# Altium PCB p253616.PcbDoc
Units mil, origin at the board's own origin, x right, y up, seen from the top; angles counter-clockwise.
Board outline 4800 x 4000 mil, 2 copper layers (Top Layer, Bottom Layer); 134 components, 116 nets, 391 pads, 60 vias.
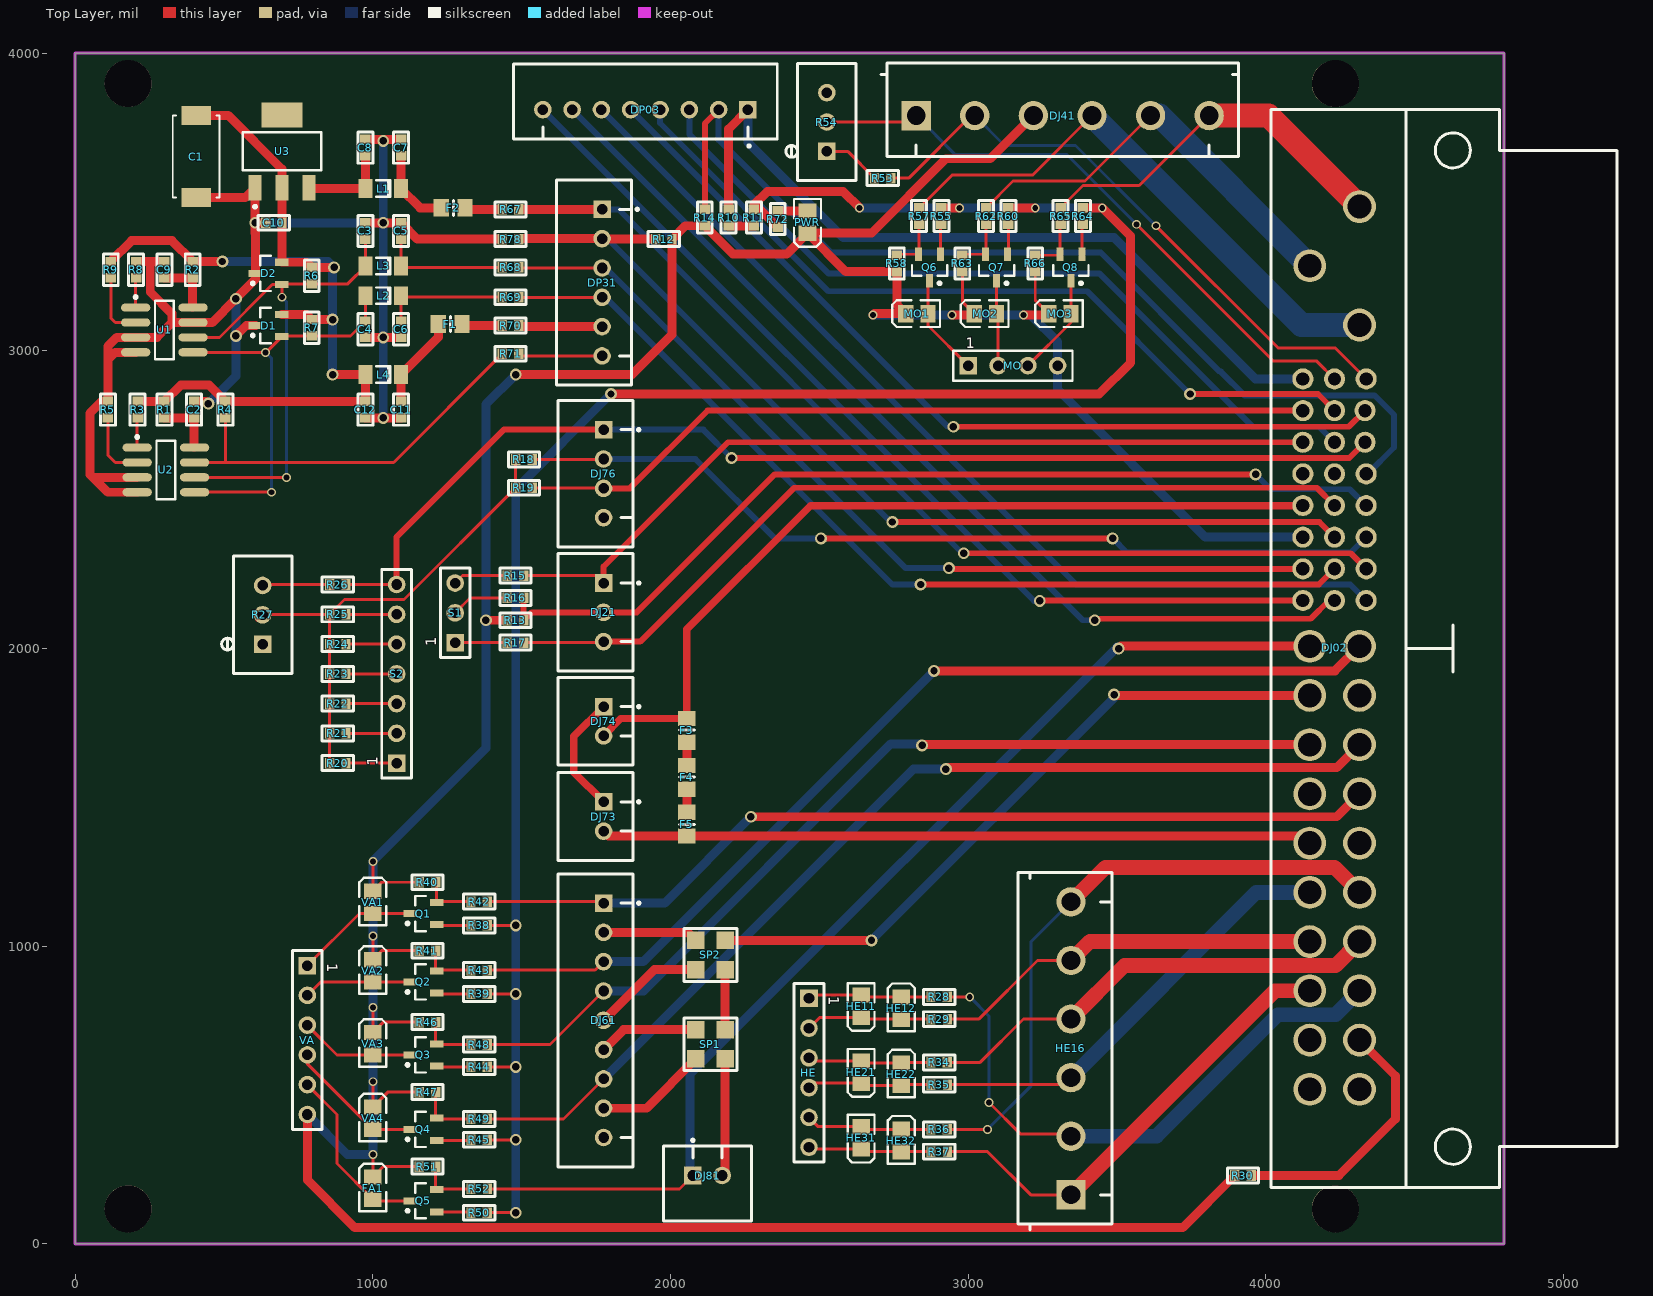
[diagram p0: Top Layer view]
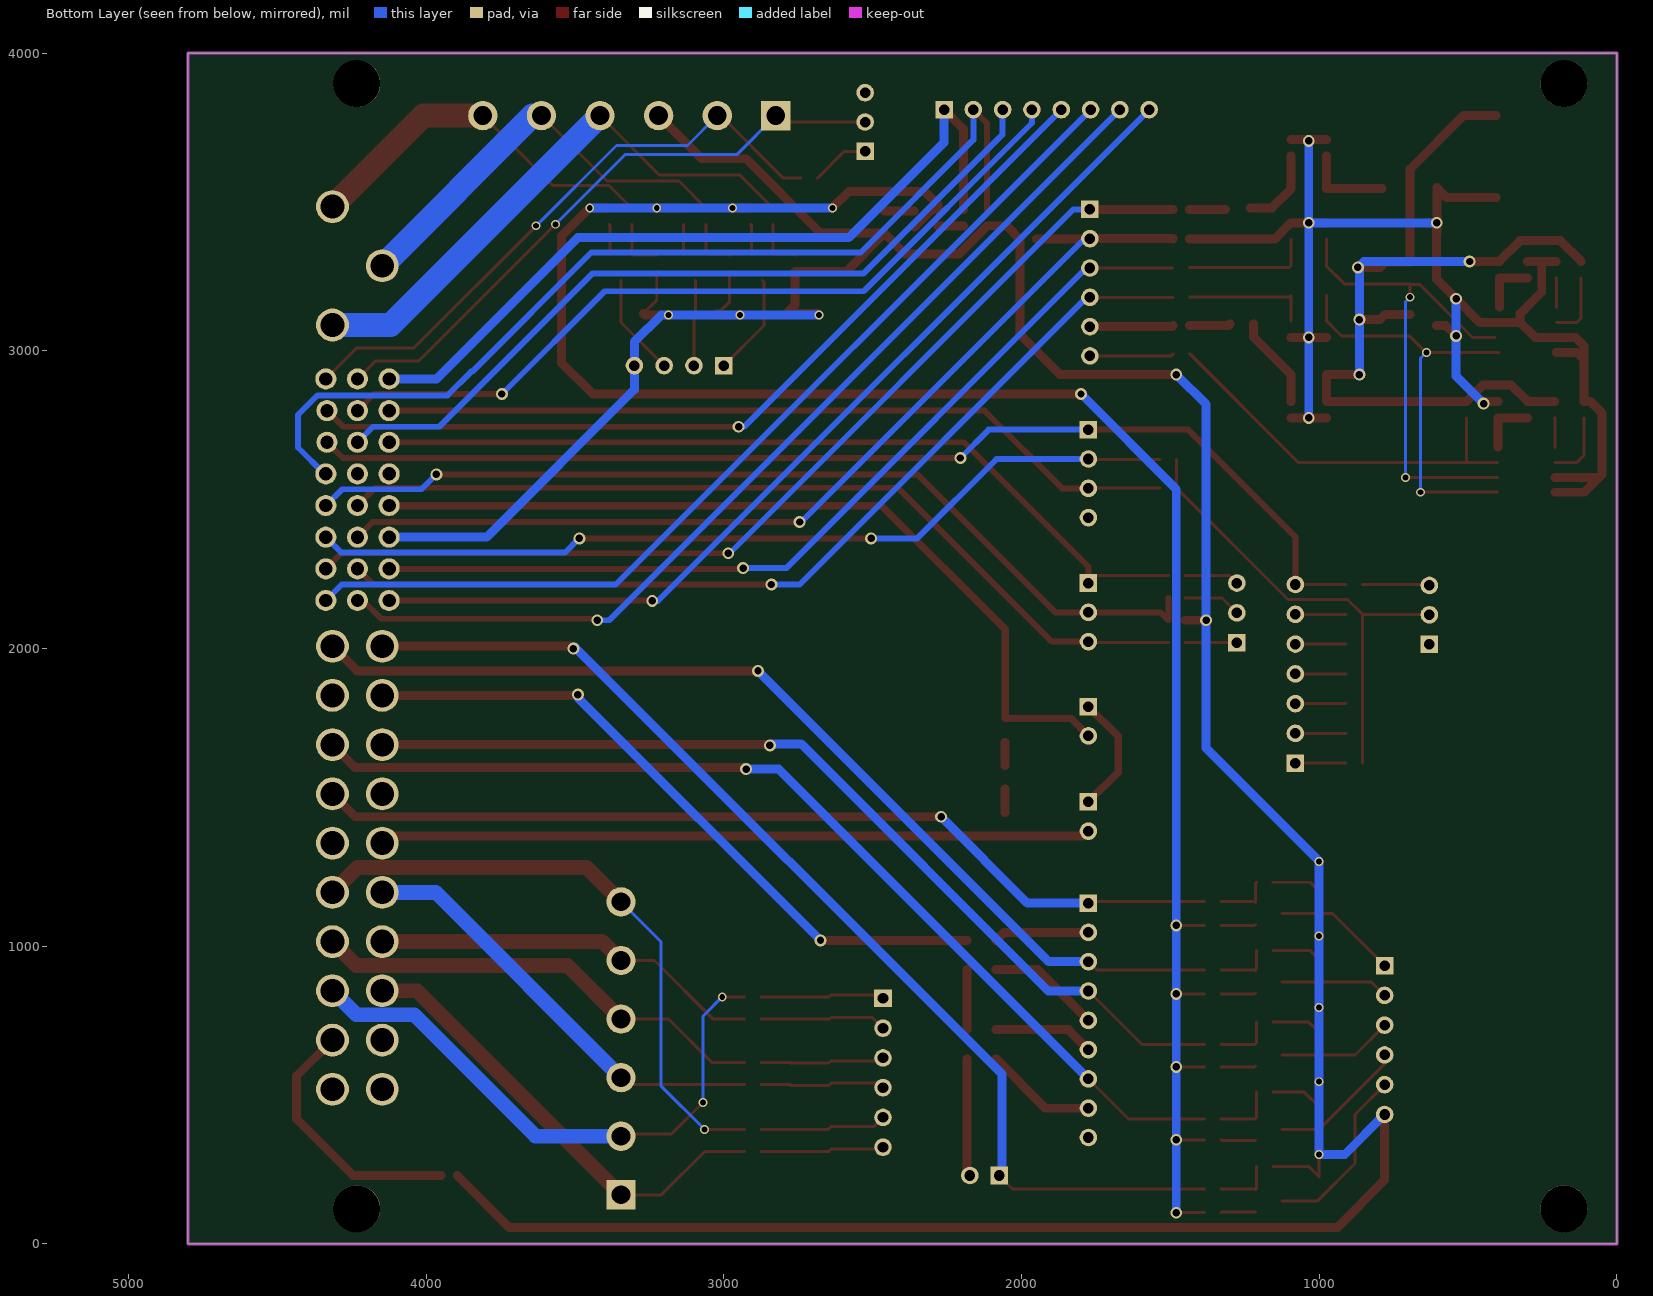
[diagram p1: Bottom Layer view, seen from below]

## Layer stack, top to bottom
Top Layer: signal copper 1.4
Dielectric: dielectric 12.6, FR-4, Dk 4.8
Bottom Layer: signal copper 1.4

## Board outline
0,0 0,4000 4800,4000 4800,0

## Design rules (kind name [scope] priority, off if disabled: settings)
Clearance [All] p1: gap=0
HoleSize [All] p1: absolutevalues=TRUE maxlimit=100 minlimit=10 maxpercent=80.000 minpercent=20.000
PolygonConnect [All] p1: connectstyle=Relief reliefconductorwidth=10 reliefentries=4 polygonreliefangle="90 Angle"
RoutingVias [All] p1: holewidth=28 width=50 viastyle="Through Hole" minholewidth=10 minwidth=30 maxholewidth=28 maxwidth=50
SilkscreenOverComponentPads [All] p1: minsilkscreentomaskgap=10
SolderMaskExpansion [All] p1: expansion=4
Width [All] p1: maxlimit=200 minlimit=10 preferedwidth=10
26 further rules are at their usual default settings.

## Classes and differential pairs
component class p253616: DJ02 DJ21 DJ41 DJ61 DJ73 DJ74 DJ76 DJ81 DP03 DP31 F3 F4 F5 FA1 HE HE11 HE12 HE16 HE21 HE22 HE31 HE32 MO MO1 MO2 MO3 PWR Q1 Q2 Q3 Q4 Q5 Q6 Q7 Q8 R10 R11 R12 R13 R14 R15 R16 R17 R18 R19 R20 R21 R22 R23 R24 R25 R26 R27 R28 R29 R30 R34 R35 R36 R37 R38 R39 R40 R41 R42 R43 R44 R45 R46 R47 R48 R49 R50 R51 R52 R53 R54 R55 R57 R58 R60 R62 R63 R64 R65 R66 R72 S1 S2 SP1 SP2 VA VA1 VA2 VA3 VA4
component class ID: C1 C2 C3 C4 C5 C6 C7 C8 C9 C10 C11 C12 D1 D2 F1 F2 L1 L2 L3 L4 R1 R2 R3 R4 R5 R6 R7 R8 R9 R67 R68 R69 R70 R71 R78 U1 U2 U3

## Components (designator, comment, footprint, x,y, rotation, side; value= is the part's Value field where it differs from the comment)
C1 "10uF/16V" 7343-CAP 410,3665 r270 top
C2 "100nF" 0603INCH_1608mm 400,2830 r270 top
C3 "33pF" 0603INCH_1608mm 975,3430 r270 top
C4 "33pF" 0603INCH_1608mm 975,3045.12 r90 top
C5 "33pF" 0603INCH_1608mm 1095,3430 r270 top
C6 "33pF" 0603INCH_1608mm 1095,3045.12 r90 top
C7 "100nF" 0603INCH_1608mm 1095,3710 r270 top
C8 "100nF" 0603INCH_1608mm 975,3710 r270 top
C9 "100nF" 0603INCH_1608mm 300,3300 r270 top
C10 "100nF" 0603INCH_1608mm 640,3430 r0 top
C11 "100nF" 0603INCH_1608mm 1095,2775 r90 top
C12 "100nF" 0603INCH_1608mm 975,2775 r90 top
D1 "BAT64-04" SOT23_N 650,3085 r180 top
D2 "BAT64-04" SOT23_N 650,3260 r180 top
DJ02 "CS-223-48" PCIH47M 4627.52,2000 r90 top locked
DJ21 "CS-223-47" XH3_2.5mm 1775,2220 r270 top
DJ41 "DP6" KF301-6P_5mm 2825,3790 r0 top locked
DJ61 "CS-223-45" XH9_2.5mm 1775,1145 r270 top
DJ73 "CS-223-11" XH2_2.5mm 1775,1485 r270 top
DJ74 "CS-223-69" XH2_2.5mm 1775,1805 r270 top
DJ76 "CS-223-87" XH4_2.5mm 1775,2735 r270 top
DJ81 "CS-223-11" XH2_2.5mm 2075,230 r0 top
DP03 "CS-223-77" XH8_2.5mm 2260,3810 r180 top
DP31 "DP6" XH6_2.5mm 1770,3475 r270 top
F1 "200mA" Fuse 1299.8,3090 r270 top
F2 "200mA" Fuse 1310,3480 r270 top
F3 "Fuse" Fuse 2055,1765 r0 top
F4 "Fuse" Fuse 2055,1607.4 r0 top
F5 "Fuse" Fuse 2055,1370 r180 top
FA1 "LED" "LED 0805" 1000,150 r90 top
HE "DP6" Pin6_2.54mm 2465,825 r270 top
HE11 "LED" "LED 0805" 2640,836.06 r270 top
HE12 "LED" "LED 0805" 2775,755 r90 top
HE16 "DP6" KF301-6P_5mm 3345,165 r90 top
HE21 "LED" "LED 0805" 2640,615 r270 top
HE22 "LED" "LED 0805" 2775,532.5 r90 top
HE31 "LED" "LED 0805" 2640,393.94 r270 top
HE32 "LED" "LED 0805" 2775,310 r90 top
L1 "33uH" "3216 Chip" 1035,3545 r180 top
L2 "33uH" "3216 Chip" 1035,3185.12 r180 top
L3 "33uH" "3216 Chip" 1035,3285 r180 top
L4 "33uH" "3216 Chip" 1035,2920 r180 top
MO "DP4" Pin4_2.54mm 3000,2950 r0 top
MO1 "LED" "LED 0805" 2865,3125 r180 top
MO2 "LED" "LED 0805" 3095,3125 r180 top
MO3 "LED" "LED 0805" 3345,3125 r180 top
PWR "LED" "LED 0805" 2460,3470 r270 top
Q1 "2N7002" SOT23_N 1170,1110 r180 top
Q2 "2N7002" SOT23_N 1170,880 r180 top
Q3 "2N7002" SOT23_N 1170,635 r180 top
Q4 "2N7002" SOT23_N 1170,385 r180 top
Q5 "2N7002" SOT23_N 1170,145 r180 top
Q6 "2N7002" SOT23_N 2870,3280 r270 top
Q7 "2N7002" SOT23_N 3095,3280 r270 top
Q8 "2N7002" SOT23_N 3345,3280 r270 top
R1 "2E21" 0603INCH_1608mm 300,2775 r90 top
R2 "2E21" 0603INCH_1608mm 395,3245 r90 top
R3 "0E" 0603INCH_1608mm 210,2775 r90 top
R4 "1K0" 0603INCH_1608mm 505,2775 r90 top
R5 "0E" 0603INCH_1608mm 110,2775 r90 top
R6 "10K" 0603INCH_1608mm 795,3225 r90 top
R7 "10K" 0603INCH_1608mm 795,3050 r90 top
R8 "0E" 0603INCH_1608mm 205,3245 r90 top
R9 "0E" 0603INCH_1608mm 120,3245 r90 top
R10 "0R" 0603INCH_1608mm 2195,3475 r270 top
R11 "0R" 0603INCH_1608mm 2280,3420 r90 top
R12 "0R" 0603INCH_1608mm 2005,3375 r180 top
R13 "0R" 0603INCH_1608mm 1451.57,2095 r0 top
R14 "0R" 0603INCH_1608mm 2115,3420 r90 top
R15 "0R" 0603INCH_1608mm 1506.57,2245 r180 top
R16 "0R" 0603INCH_1608mm 1506.57,2170 r180 top
R17 "0R" 0603INCH_1608mm 1506.57,2020 r180 top
R18 "0R" 0603INCH_1608mm 1535,2635 r180 top
R19 "0R" 0603INCH_1608mm 1535,2540 r180 top
R20 "110R" 0603INCH_1608mm 910,1615 r180 top
R21 "130R" 0603INCH_1608mm 855,1715 r0 top
R22 "143R" 0603INCH_1608mm 855,1815 r0 top
R23 "178R" 0603INCH_1608mm 910,1915 r180 top
R24 "165R" 0603INCH_1608mm 910,2015 r180 top
R25 "150R" 0603INCH_1608mm 910,2115 r180 top
R26 "110R" 0603INCH_1608mm 855,2215 r0 top
R27 "200R" 3296W 630,2015 r90 top
R28 "100K" 0603INCH_1608mm 2930,830 r180 top
R29 "100K" 0603INCH_1608mm 2875,755 r0 top
R30 "0R" 0603INCH_1608mm 3895,230 r0 top
R34 "100K" 0603INCH_1608mm 2930,610 r180 top
R35 "100K" 0603INCH_1608mm 2875,535 r0 top
R36 "100K" 0603INCH_1608mm 2930,385 r180 top
R37 "100K" 0603INCH_1608mm 2875,310 r0 top
R38 "1K" 0603INCH_1608mm 1385,1070 r180 top
R39 "1K" 0603INCH_1608mm 1385,840 r180 top
R40 "1K" 0603INCH_1608mm 1210.93,1215 r180 top
R41 "1K" 0603INCH_1608mm 1210.93,985 r180 top
R42 "10K" 0603INCH_1608mm 1385,1150 r180 top
R43 "10K" 0603INCH_1608mm 1385,920 r180 top
R44 "1K" 0603INCH_1608mm 1385,595 r180 top
R45 "1K" 0603INCH_1608mm 1385,350 r180 top
R46 "1K" 0603INCH_1608mm 1210.93,745 r180 top
R47 "1K" 0603INCH_1608mm 1210.93,510 r180 top
R48 "10K" 0603INCH_1608mm 1385,670 r180 top
R49 "10K" 0603INCH_1608mm 1385,420 r180 top
R50 "1K" 0603INCH_1608mm 1385,105 r180 top
R51 "1K" 0603INCH_1608mm 1210.93,260 r180 top
R52 "10K" 0603INCH_1608mm 1330,185 r0 top
R53 "1K" 0603INCH_1608mm 2740,3580 r180 top
R54 "100K" 3296W 2525,3670 r90 top
R55 "1K" 0603INCH_1608mm 2910,3480 r270 top
R57 "10K" 0603INCH_1608mm 2835,3480 r270 top
R58 "1K" 0603INCH_1608mm 2760,3320.93 r270 top
R60 "1K" 0603INCH_1608mm 3135,3480 r270 top
R62 "10K" 0603INCH_1608mm 3060,3480 r270 top
R63 "1K" 0603INCH_1608mm 2980,3320.93 r270 top
R64 "1K" 0603INCH_1608mm 3385,3480 r270 top
R65 "10K" 0603INCH_1608mm 3310,3480 r270 top
R66 "1K" 0603INCH_1608mm 3225,3320.93 r270 top
R67 "0R" 0603INCH_1608mm 1435,3475 r0 top
R68 "0R" 0603INCH_1608mm 1435,3280 r0 top
R69 "0R" 0603INCH_1608mm 1435,3180 r0 top
R70 "0R" 0603INCH_1608mm 1435,3085 r0 top
R71 "0R" 0603INCH_1608mm 1435,2990 r0 top
R72 "1K" 0603INCH_1608mm 2360,3415 r90 top
R78 "0R" 0603INCH_1608mm 1435,3375 r0 top
S1 "SW-SPDT DIP" Pin3_2.54mm 1276.57,2020 r90 top
S2 "SW-6WAY" Pin7_2.54mm 1080,1615 r90 top
SP1 "Splice" SP4 2085,720 r0 top
SP2 "Splice" SP4 2085,1020 r0 top
U1 "FM24C64S" SOIC127P600-8M 299.88,3070 r0 top
U2 "24LC64E/SN" SOIC127P600-8M 305,2600 r0 top
U3 "LM1117" SOT223 695,3670 r270 top
VA "DP6" Pin6_2.54mm 780,935 r270 top
VA1 "LED" "LED 0805" 1000,1110 r90 top
VA2 "LED" "LED 0805" 1000,880 r90 top
VA3 "LED" "LED 0805" 1000,635 r90 top
VA4 "LED" "LED 0805" 1000,385 r90 top

## Footprints (in the part's own frame and the unit in brackets; to place one, negate y for a bottom-side part, rotate by r counter-clockwise, add the part's x,y. Pads: shape width x height; smd on the part's side, far side on the other; paste and mask are expansions set on the pad)
0603INCH_1608mm [mm]
  rect 0.8x0.9 smd: 1(0,0) 2(1.4,0)
  silkscreen extent -0.64,-0.64 2.03,0.64
"3216 Chip" [mm] "Chip Inductor; Body 3.2 x 1.6 mm (LxW typ)"
  rect 1.2x1.6 smd: 1(-1.5,0) 2(1.5,0)
  silkscreen extent -0.6,-0.7 0.6,0.7
3296W [mm]
  rect 1.5x1.5 hole 0.9: 1(0,0)
  round 1.5 hole 0.9: 2(2.5,0) 3(5,0)
  silkscreen extent -2.5,-2.5 7.5,3.5
7343-CAP [mm]
  rect 1.6x2.5 smd: 1(-3.186,-0.083) 2(3.814,-0.083)
  silkscreen extent -3.19,-2.08 3.81,1.92
Fuse [mm]
  rect 1.5x1.3 smd: 1(0,0) 2(0,-2.027)
  silkscreen extent -0.63,-0.99 0.64,-0.99
KF301-6P_5mm [mm] "W7.7"
  rect 2.5x2.5 hole 1.6: 1(0,0)
  round 2.5 hole 1.6: 2(5,0) 3(10,0) 4(15,0) 5(20,0) 6(25,0)
  silkscreen extent -3,-3.5 27.5,4.5
"LED 0805" [mm]
  rect 1.3x1.5 smd: A(0,0) K(1.905,0)
  silkscreen extent -1.02,-1.15 3.05,1.15
PCIH47M [mm]
  round 2.8 hole 2.03: 1(-37.6,12.21) 2(-37.6,7.96) 3(-33.4,12.21) 4(-33.4,7.96) 5(-29.2,12.21) 6(-29.2,7.96) 7(-25,12.21) 8(-25,7.96) 9(-20.8,12.21) 10(-20.8,7.96) 11(-16.6,12.21) 12(-16.6,7.96) 13(-12.4,12.21) 14(-12.4,7.96) 15(-8.2,12.21) 16(-8.2,7.96) 17(-4,12.21) 18(-4,7.96) 19(0.2,12.21) 20(0.2,7.96) 45(27.6,7.96) 46(32.65,12.21) 47(37.7,7.96)
  round 1.8 hole 1.14 paste+0: 21(4.1,12.79) 22(4.1,10.09) 23(4.1,7.39) 24(6.8,12.79) 25(6.8,10.09) 26(6.8,7.39) 27(9.5,12.79) 28(9.5,10.09) 29(9.5,7.39) 30(12.2,12.79) 31(12.2,10.09) 32(12.2,7.39) 33(14.9,12.79) 34(14.9,10.09) 35(14.9,7.39) 36(17.6,12.79) 37(17.6,10.09) 38(17.6,7.49) 39(20.3,12.79) 40(20.3,10.09) 41(20.3,7.49) 42(23,12.79) 43(23,10.09) 44(23,7.39)
  silkscreen extent -46,-14 46,15.5
Pin3_2.54mm [mm]
  rect 1.5x1.5 hole 0.9: 1(0,0)
  round 1.5 hole 0.9: 2(2.54,0) 3(5.08,0)
  silkscreen extent -1.27,-1.27 6.35,1.27
Pin4_2.54mm [mm]
  rect 1.5x1.5 hole 0.9: 1(0,0)
  round 1.5 hole 0.9: 2(2.54,0) 3(5.08,0) 4(7.62,0)
  silkscreen extent -1.27,-1.27 8.89,1.27
Pin6_2.54mm [mm]
  rect 1.5x1.5 hole 0.9: 1(0,0)
  round 1.5 hole 0.9: 2(2.54,0) 3(5.08,0) 4(7.62,0) 5(10.16,0) 6(12.7,0)
  silkscreen extent -1.27,-1.27 13.97,1.27
Pin7_2.54mm [mm]
  rect 1.5x1.5 hole 0.9: 1(0,0)
  round 1.5 hole 0.9: 2(2.54,0) 3(5.08,0) 4(7.62,0) 5(10.16,0) 6(12.7,0) 7(15.24,0)
  silkscreen extent -1.27,-1.27 16.51,1.27
SOIC127P600-8M [mm] "SOIC, 8-Leads, Body 4.9x3.9mm, Pitch 1.27mm, IPC Low Density"
  oval 2.5x0.7 smd: 1(-2.45,1.905) 2(-2.45,0.635) 3(-2.45,-0.635) 4(-2.45,-1.905) 5(2.45,-1.905) 6(2.45,-0.635) 7(2.45,0.635) 8(2.45,1.905)
  silkscreen extent -2.57,-2.5 0.8,2.93, body extent -2,-2.5 2,2.5, height 1.75
SOT23_N [mm] "SOT23, 3-Leads, Body 2.9x1.3mm, Pitch 0.95mm, Lead Span 2.3mm - Reverse Pinning, IPC Medium Density"
  rect 1.15x0.6 smd: 1(1.125,0) 2(-1.125,-0.95) 3(-1.125,0.95)
  silkscreen extent -0.2,-1.5 1.47,1.5, body extent -0.7,-1.5 0.7,1.5, height 1.1
SOT223 [mm]
  rect 2.15x1.1 smd: 1(3.1,-2.3) 2(3.1,0) 3(3.1,2.3)
  rect 2.15x3.5 smd: 4(-3.1,0)
  silkscreen extent -1.62,-3.35 4.85,3.35
SP4 [mm]
  rect 1.5x1.5 smd: 1(0,0) 2(2.5,0) 3(0,-2.5) 4(2.5,-2.5)
  silkscreen extent -1,-3.5 3.5,1
XH2_2.5mm [mm] "W5.9mm"
  rect 1.5x1.5 hole 0.9: 1(0,0)
  round 1.5 hole 0.9: 2(2.5,0)
  silkscreen extent -2.5,-3.9 5,3.1
XH3_2.5mm [mm] "W5.9mm"
  rect 1.5x1.5 hole 0.9: 1(0,0)
  round 1.5 hole 0.9: 2(2.5,0) 3(5,0)
  silkscreen extent -2.5,-3.9 7.5,3.1
XH4_2.5mm [mm] "W5.9mm"
  rect 1.5x1.5 hole 0.9: 1(0,0)
  round 1.5 hole 0.9: 2(2.5,0) 3(5,0) 4(7.5,0)
  silkscreen extent -2.5,-3.9 10,3.1
XH6_2.5mm [mm] "W5.9mm"
  rect 1.5x1.5 hole 0.9: 1(0,0)
  round 1.5 hole 0.9: 2(2.5,0) 3(5,0) 4(7.5,0) 5(10,0) 6(12.5,0)
  silkscreen extent -2.5,-3.9 15,3.1
XH8_2.5mm [mm] "W5.9mm"
  rect 1.5x1.5 hole 0.9: 1(0,0)
  round 1.5 hole 0.9: 2(2.5,0) 3(5,0) 4(7.5,0) 5(10,0) 6(12.5,0) 7(15,0) 8(17.5,0)
  silkscreen extent -2.5,-3.9 20,3.2
XH9_2.5mm [mm] "W5.9mm"
  rect 1.5x1.5 hole 0.9: 1(0,0)
  round 1.5 hole 0.9: 2(2.5,0) 3(5,0) 4(7.5,0) 5(10,0) 6(12.5,0) 7(15,0) 8(17.5,0) 9(20,0)
  silkscreen extent -2.5,-3.9 22.5,3.1

## Part data
C1: library part Cap_Pol
C2 C3 C4 C5 C6 C7 C8 C9 C10 C11 C12: library part Cap
DJ02: library part PCIH47
DJ21: library part DP3
DJ61: library part DP9
DJ73 DJ74 DJ81: library part DP2
DJ76: library part DP4
DP03: library part DP8
F1 F2: library part Fuse
L1 L2 L3 L4: library part Inductor
Q1 Q2 Q3 Q4 Q5 Q6 Q7 Q8: library part NPN
R1 R2 R3 R4 R5 R6 R7 R8 R9 R10 R11 R12 R13 R14 R15 R16 R17 R18 R19 R20 R21 R22 R23 R24 R25 R26 R28 R29 R30 R34 R35 R36 R37 R38 R39 R40 R41 R42 R43 R44 R45 R46 R47 R48 R49 R50 R51 R52 R53 R55 R57 R58 R60 R62 R63 R64 R65 R66 R67 R68 R69 R70 R71 R72 R78: library part Res
R27 R54: library part RPot
U1 U2: library part "IIC Mem"
U3: library part 7805

## Free pads (board coordinates)
  round 157.48 hole 157.48: 0(177.95,118.11) 0(177.95,3897.64) 0(4233.07,118.11) 0(4233.07,3897.64)

## Via types
v1: diameter 40, hole 25, Top Layer to Bottom Layer, 39 vias
v2: diameter 30, hole 20, Top Layer to Bottom Layer, 20 vias
v3: diameter 30, hole 20, Top Layer to Bottom Layer, tented bottom, 1 vias

## Nets (pads, with @x,y where several pads share a name; then routed paths per layer and width w, separated by ;. In a path a pad name is that pad's centre, name@x,y a point inside that pad or via, vN(x,y) a via of type N, cw(c..) or ccw(c..) an arc to the next point about the centre after c; other vN are vias at no path point)
5V: R10.2 R11.1 | length 85
  Top Layer w30: R10.2 2279.88,3419.88 R11.1
5VIN: F1.1 R70.1 | length 137.3
  Top Layer w30: F1.1 1304.8,3085 R70.1
12VIN: F2.1 R67.1 | length 120
  Top Layer w30: F2.1@1315,3475 R67.1
+5V: C1.1 C10.2 C12.2 D1.2 D2.2 L4.2 R1.2 R2.2 R3.2 R4.2 R6.2 R7.2 R9.2 U3.2 | length 3217.9
  Top Layer w30: R9.2 189.88,3370 325.12,3370 R2.2 v1@494.88,3300.12 ; R3.2 R1.2 354.88,2885 450.12,2885 R4.2 C12.2 975,2919.06 L4.2 v1(865,2920) ; C1.1 514.57,3790.43 695,3610 U3.2 C10.2@695,3430.12 ; D1.2 777.72,3122.4 R7.2 ; C10.2@694.29,3429.17 D2.2 777.72,3297.4 R6.2 ; R7.2@795.12,3105 v1(865,3105) ; R6.2@795.12,3280 v1(870,3280)
  Bottom Layer w30: v1(495,3300) 850,3300 v1(870,3280) ; v1(865,2920) v1(865,3105) v1@865,3275
CA-22-021: DJ02.21 DP03.8 | length 3225
  Top Layer w20: v1@3251.42,2161.42 DJ02.21
  Bottom Layer w20: DP03.8 3221.02,2160 v1(3240,2160)
CA-22-022: DJ02.22 DP03.7 | length 3312.2
  Top Layer w20: v1@3415,2100 4150,2100 4211.42,2161.42 DJ02.22
  Bottom Layer w20: DP03.7@1675,3810 DP03.7 3384.45,2095 v1(3425,2095)
CA-22-023: DJ02.23 DP03.6 | length 3251.6
  Bottom Layer w20: DP03.6 3362.87,2215 4282.99,2215 DJ02.23
DS-22-031: DJ02.31 DJ21.3 R17.1 | length 2945.9
  Top Layer w10: R17.1 DJ21.3@1758.43,2020
  Top Layer w20: DJ21.3 1898.15,2023.15 2415,2540 4170.59,2540 DJ02.31
DS-22-032N: DJ02.32 DJ21.2 R13.2 R16.1 | length 3143.5
  Top Layer w10: DJ21.2@1760,2120 DJ21.2@1761.57,2121.57
  Top Layer w20: R16.1 1506.69,2169.88 R13.2 1533.27,2121.57 1761.57,2121.57 DJ21.2 ; DJ21.2@1785,2121.57 1886.57,2121.57 2350,2585 v1(3965,2585)
  Bottom Layer w20: v1(3965,2585) 4015,2535 4281.89,2535 DJ02.32
DS-22-036: DJ02.36 DJ21.1 R15.1 | length 2855.9
  Top Layer w10: R15.1 1750,2245 DJ21.1
  Top Layer w20: DJ21.1 1775,2275 2192.91,2692.91 DJ02.36
FA-22-019: DJ02.19 DJ81.1 R52.2 | length 3740.2
  Top Layer w10: R52.2 2030,185 DJ81.1
  Top Layer w30: v1(3505,2000) 3512.87,2007.87 DJ02.19
  Bottom Layer w30: DJ81.1 2065,240 2065,570 v1@3500,2005 ; DJ02.19@4137.56,1998.62 DJ02.19
FA-22-059N: DJ81.2 SP1.4 | length 395.7
  Top Layer w30: DJ81.2 2183.43,240 SP1.4
FA_LED: FA1.A Q5.1 VA.5 | length 603.9
  Top Layer w10: VA.5 880,435 880,270 FA1.A 1005,145 Q5.1
FI-16-064: DJ02.1
FI-16-065: DJ02.2
FI-16-066: DJ02.3
GD-22-035: DJ02.35 DP03.2 R14.2 | length 3346.7
  Top Layer w20: R14.2 2115,3763.43 DP03.2
  Bottom Layer w20: DP03.2 2161.57,3708.43 2540,3330 3445,3330 3845,2930 3848.28,2930 3928.28,2850 4365,2850 4430,2785 4430,2675 4341.61,2586.61 DJ02.35
GND: DJ02.27 DJ41.3 FA1.K MO1.K MO2.K MO3.K MO.4 PWR.K R12.1 R13.1 R14.1 R30.1 R40.2 R41.2 R46.2 R47.2 R51.2 R58.2 R63.2 R66.2 VA1.K VA2.K VA3.K VA4.K VA.6 | length 13250.4
  Top Layer w10: v2(1000,300) FA1.K 1035,260 R51.2 ; v2(1000,545) VA4.K 1050,510 R47.2 ; v2(1000,795) VA3.K 1035,745 R46.2 ; v2(1000,1035) VA2.K 1030,985 R41.2 ; v2(1000,1285) VA1.K 1030,1215 R40.2 ; PWR.K@2460,3375 PWR.K ; R63.2 2980,3165 MO2.K ; R66.2 3225,3170 MO3.K
  Top Layer w30: VA.6 780,215 940,55 3720,55 R30.1 ; v1(1380,2095) R13.1 ; v1(1480,2920) 1870,2920 2005,3055 R12.1 2050,3420 R14.1 2210,3325 2390,3325 PWR.K ; v2(2680,3120) 2685,3125 MO1.K 2760,3155 R58.2 2589.19,3265.81 PWR.K ; v3(2945,3120) 3015,3120 MO2.K ; v2(3185,3120) 3265,3120 MO3.K ; DJ41.3 3073.7,3645 2925,3645 2675,3395 PWR.K
  Bottom Layer w30: VA.6 915,300 v2(1000,300) v2(1000,545) v2(1000,795) v2(1000,1035) v2(1000,1285) 1380,1665 v1(1380,2095) 1380,2820 v1(1480,2920) ; v2(2680,3120) v3(2945,3120) v2(3185,3120) 3210,3120 3300,3030 MO.4 3300,2870 3795.98,2374.02 DJ02.27
HE-16-005: DJ02.5 HE16.1 R37.2 | length 1560.7
  Top Layer w10: R37.2 3065,310 3210,165 HE16.1
  Top Layer w50: HE16.1 4030.39,850.39 DJ02.5
HE-16-006: DJ02.6 HE16.2 R28.1 | length 1950.3
  Top Layer w10: R28.1 v2(3005,830) ; v2(3070,475) 3175,370 3336.85,370 HE16.2
  Bottom Layer w10: v2(3005,830) 3070,765 v2(3070,475)
  Bottom Layer w50: HE16.2 3631.85,361.85 4040,770 4233.74,770 DJ02.6
HE-16-007: DJ02.7 HE16.5 R29.2 | length 1324.7
  Top Layer w10: R29.2 3035,755 3232.4,952.4 HE16.5
  Top Layer w50: HE16.5 3408.35,1015.75 DJ02.7
HE-16-008: DJ02.8 HE16.4 R34.1 | length 1552.2
  Top Layer w10: R34.1 3040,610 3185.55,755.55 HE16.4
  Top Layer w50: HE16.4 3524.45,935 4233.39,935 DJ02.8
HE-16-009: DJ02.9 HE16.3 R35.2 | length 1484.3
  Top Layer w10: R35.2 3321.3,535 HE16.3
  Bottom Layer w50: HE16.3 3967.4,1181.1 DJ02.9
HE-16-010: DJ02.10 HE16.6 R36.1 | length 2067.1
  Top Layer w10: R36.1 v2(3065,385)
  Top Layer w50: HE16.6 3460.75,1265 4230.24,1265 DJ02.10
  Bottom Layer w10: v2(3065,385) 3210,530 3210,1014.25 HE16.6
HE_LED11: HE11.A HE12.K HE.1 R28.2 | length 417
  Top Layer w10: HE.1 2476.06,836.06 HE11.A 2646.06,830 HE12.K R28.2
HE_LED12: HE11.K HE12.A HE.2 R29.1 | length 427.4
  Top Layer w10: HE.2 2501.06,761.06 HE11.K 2646.06,755 HE12.A R29.1
HE_LED21: HE21.A HE22.K HE.3 R34.2 | length 418.2
  Top Layer w10: HE.3 2475,615 HE21.A 2647.5,607.5 HE22.K 2777.5,610 R34.2
HE_LED22: HE21.K HE22.A HE.4 R35.1 | length 420.4
  Top Layer w10: HE.4 2480,540 HE21.K 2647.5,532.5 HE22.A 2777.5,535 R35.1
HE_LED31: HE31.A HE32.K HE.5 R36.2 | length 426.5
  Top Layer w10: HE.5 2496.06,393.94 HE31.A 2648.94,385 HE32.K R36.2
HE_LED32: HE31.K HE32.A HE.6 R37.1 | length 416.2
  Top Layer w10: HE.6 2471.06,318.94 HE31.K 2648.94,310 HE32.A R37.1
IC-22-024: DJ02.24 DP31.3 R68.2 | length 3050.5
  Top Layer w10: R68.2@1491.97,3278.15 DP31.3
  Top Layer w20: v1(2935,2270) 2937.28,2267.72 DJ02.24
  Bottom Layer w20: DP31.3 1781.85,3278.15 2790,2270 v1(2935,2270)
IC-22-025: DJ02.25 DP31.4 R69.2 | length 3161.3
  Top Layer w10: R69.2@1490.39,3179.72 DP31.4
  Top Layer w20: v1(2840,2215) 4177.56,2215 DJ02.25
  Bottom Layer w20: DP31.4 1780.28,3179.72 2745,2215 v1(2840,2215)
IC-22-026: DJ02.26 DP31.1 R67.2 | length 3367.6
  Top Layer w20: v1(2985,2320) 4284.29,2320 DJ02.26
  Top Layer w30: R67.2 DP31.1
  Bottom Layer w20: DP31.1 1825,3475 v1@2987.5,2312.5 ; DJ02.26@4321.14,2267.72 DJ02.26
IC-22-028N: DJ02.28 DP31.2 R12.2 R78.2 | length 3324.5
  Top Layer w20: v1(2745,2425) 4179.29,2425 DJ02.28
  Top Layer w30: R78.2 1491.69,3376.57 DP31.2 1771.57,3375 R12.2
  Bottom Layer w20: DP31.2 1788.43,3376.57 v1@2735,2430
IC-22-037: DJ02.37 DP03.3 | length 2681.7
  Top Layer w20: DJ02.37@4227.09,2692.91 DJ02.37
  Bottom Layer w20: DP03.3 2063.15,3726.85 2530,3260 3440,3260 3955,2745 4178.19,2745 DJ02.37
IC-22-040: DJ02.40 DP03.4 | length 2719.9
  Top Layer w20: v1(3745,2855) 4174.49,2855 DJ02.40
  Bottom Layer w20: DP03.4 1964.72,3765.28 2530,3200 3400,3200 v1(3745,2855) ; DJ02.40@4220.79,2799.21 DJ02.40
IC-22-041: DJ02.41 DP03.5 | length 2942.7
  Top Layer w20: DP03.5@1866.3,3808.7 DP03.5 ; v1(2950,2745) 4278.43,2745 DJ02.41
  Bottom Layer w20: DP03.5 2931.3,2745 v1(2950,2745) ; DJ02.41@4321.14,2799.21 DJ02.41
IDGND: C1.2 C2.1 C3.1 C4.1 C5.1 C6.1 C7.1 C8.1 C9.1 C10.1 C11.1 C12.1 D1.1 D2.1 R5.2 R8.2 R78.1 U1.3 U1.4 U1.7 U2.3 U2.4 U3.1 | length 5122.6
  Top Layer w30: U1.4 135,2995 110,2970 ; R8.2 252.44,3300.12 ; U2.4 110,2525 62.5,2572.5 ; U2.3 65,2575 62.5,2572.5 ; C9.1@299.88,3300.12 252.44,3300.12 ; C2.1 v1@440,2830 ; C1.2 571.34,3514.84 U3.1 604.45,3425.55 v1@605,3425 ; v1(540,3050) 575,3085 D1.1 ; C10.1 v1(605,3430) v1@605,3425 ; C12.1 v1(1035,2775) C11.1 ; C4.1 C6.1 ; C3.1 v1(1035,3430) C5.1 1150,3375 R78.1 ; C8.1 C7.1 ; 62.5,2572.5 50,2585 50,2790 90.12,2830.12 R5.2 110,2970 ; 110,2970 110,3015 140,3045 U1.3 275,3045 325,3095 ; 252.44,3300.12 252.44,3197.56 325,3125 325,3095 ; 325,3095 U1.7 460,3095 v1(540,3175) 605.71,3240.71 D2.1 605.71,3395.71 ; v1@605,3425 605.71,3424.29 605.71,3395.71 ; v1@605,3425 605,3396.42 605.71,3395.71
  Bottom Layer w30: v1(447.5,2822.5) 540,2915 v1(540,3050) v1(540,3175) ; v1(605,3430) v1(1035,3430) ; v1(1035,2775) v1(1035,3045) v1(1035,3430) ; v1(1035,3705) v1(1035,3430)
MO-16-045: DJ02.45 DJ41.4 R57.1 | length 1898.9
  Top Layer w10: R57.1 2945,3590 3215.55,3590 DJ41.4
  Bottom Layer w80: DJ41.4 4118.94,3086.61 DJ02.45
MO-16-046: DJ02.46 DJ41.5 R62.1 | length 1424.2
  Top Layer w10: R62.1 3150,3570 3392.4,3570 DJ41.5
  Bottom Layer w80: DJ41.5 3642.24,3790 DJ02.46
MO-16-047: DJ02.47 DJ41.6 R65.1 | length 1259.2
  Top Layer w10: R65.1 3385,3555 3574.25,3555 DJ41.6
  Top Layer w80: DJ41.6 4008.39,3790 DJ02.47
MO-22-043: DJ02.43 DJ41.1 R54.2 | length 2084.8
  Top Layer w10: R54.2 2803.43,3768.43 DJ41.1 ; v2(3565,3425) 4025,2965 4170.79,2965 DJ02.43 DJ02.43@4230.28,2909.72
  Bottom Layer w10: DJ41.1 2955,3660 3330,3660 v2(3565,3425)
MO-22-044: DJ02.44 DJ41.2 R53.1 | length 2068.5
  Top Layer w10: R53.1 2800,3580 3010,3790 DJ41.2 DJ41.2@3035,3776.85 ; v2(3630,3420) 4040,3010 4232.09,3010 DJ02.44
  Bottom Layer w10: DJ41.2 3121.85,3690 3360,3690 v2(3630,3420)
MO_LED1: MO1.A MO.1 Q6.1 | length 343.7
  Top Layer w10: Q6.1 2865,3230.71 MO1.A 2865,3085 MO.1
MO_LED2: MO2.A MO.2 Q7.1 | length 287.8
  Top Layer w10: Q7.1 MO2.A 3100,3120 MO.2
MO_LED3: MO3.A MO.3 Q8.1 | length 345.8
  Top Layer w10: MO.3 3345,3095 MO3.A Q8.1
NetC2_2: C2.2 R1.1 U2.8 | length 198.5
  Top Layer w30: R1.1 399.88,2775 C2.2 U2.8@400,2676.46
NetC3_2: C3.2 D2.3 L3.2 R6.1 U1.6 U2.6 | length 1715.9
  Top Layer w10: U2.6 v2(710,2575) ; U1.6@410,3045 485,3045 662.6,3222.6 D2.3 696.69,3225 R6.1 915.94,3225 L3.2 ; v2(695,3180) D2.3@695,3221.89 ; L3.2@975,3285.94 C3.2
  Bottom Layer w10: v2(695,3180) 710,3165 v2(710,2575)
NetC4_2: C4.2 D1.3 L2.2 R7.1 U1.5 U2.5 | length 1444.4
  Top Layer w10: U1.5 v2(640,2995) 641.69,2995 D1.3 696.69,3050 R7.1 924.76,3050 C4.2 975.94,3101.18 L2.2 ; U2.5 v2(660,2525)
  Bottom Layer w10: v2(640,2995) 660,2975 v2(660,2525)
NetC7_2: C7.2 F2.2 L1.1 | length 272
  Top Layer w30: L1.1 1159.06,3480 F2.2 ; L1.1@1095,3545.94 C7.2
NetC8_2: C8.2 L1.2 U3.3 | length 296.4
  Top Layer w30: U3.3@788.5,3545 L1.2 C8.2@975.94,3653.94
NetC9_2: C9.2 R2.1 U1.8 | length 193.3
  Top Layer w30: C9.2 394.88,3244.88 U1.8@394.88,3146.46
NetC11_2: C11.2 F1.2 L4.1 | length 311.1
  Top Layer w30: L4.1 1220,3045.94 F1.2 ; C11.2 L4.1@1095,2919.06
NetDJ02_4: DJ02.4 R30.2 | length 878.7
  Top Layer w30: R30.2 4245,230 4435,420 4435,564.17 DJ02.4
NetDP31_5: DP31.5 R70.2 | length 281.4
  Top Layer w30: R70.2 1493.82,3081.3 DP31.5
NetDP31_6: DP31.6 R71.2 | length 282.8
  Top Layer w10: R71.2 1497.24,2982.87 DP31.6
NetF3_2: F3.2 F4.1 | length 77.8
  Top Layer w30: F4.1 F3.2
NetF4_2: F4.2 F5.2 | length 77.8
  Top Layer w30: F5.2 F4.2
NetPWR_A: PWR.A R72.2 | length 100.2
  Top Layer w30: R72.2 2360.12,3470 PWR.A PWR.A@2459.88,3470.12
NetQ1_2: Q1.2 R40.1 R42.2 | length 185.7
  Top Layer w10: R40.1 1214.29,1211.64 Q1.2 1216.89,1150 R42.2
NetQ1_3: Q1.3 R38.2 | length 116.7
  Top Layer w10: Q1.3 1216.89,1070 R38.2
NetQ2_2: Q2.2 R41.1 R43.2 | length 184.1
  Top Layer w10: R41.1 1210.93,925.96 Q2.2@1216.89,920 ; Q2.2 Q2.2@1216.89,920 ; R43.2 Q2.2@1216.89,920
NetQ2_3: Q2.3 R39.2 | length 116.7
  Top Layer w10: Q2.3 1216.89,840 R39.2
NetQ3_2: Q3.2 R46.1 R48.2 | length 190.6
  Top Layer w10: R46.1 1210.93,675.76 Q3.2 1216.69,670 R48.2
NetQ3_3: Q3.3 R44.2 | length 116.7
  Top Layer w10: Q3.3 1216.89,595 R44.2
NetQ4_2: Q4.2 R47.1 R49.2 | length 205.6
  Top Layer w10: R47.1 1210.93,425.76 Q4.2 1216.69,420 R49.2
NetQ4_3: Q4.3 R45.2 | length 116.6
  Top Layer w10: Q4.3 1327.48,347.6 R45.2
NetQ5_2: Q5.2 R51.1 R52.1 | length 195.8
  Top Layer w10: R51.1 1210.93,185.76 Q5.2 1216.89,185 R52.1
NetQ5_3: Q5.3 R50.2 | length 116.7
  Top Layer w10: Q5.3 1327.28,107.6 R50.2
NetQ6_2: Q6.2 R57.2 R58.1 | length 175.6
  Top Layer w10: R58.1 2763.36,3324.29 Q6.2 2835,3326.69 R57.2
NetQ6_3: Q6.3 R55.2 | length 101.7
  Top Layer w10: Q6.3 2907.4,3422.28 R55.2
NetQ7_2: Q7.2 R62.2 R63.1 | length 180.6
  Top Layer w10: R63.1 2983.36,3324.29 Q7.2 3060,3326.69 R62.2
NetQ7_3: Q7.3 R60.2 | length 101.7
  Top Layer w10: Q7.3 3135,3326.89 R60.2
NetQ8_2: Q8.2 R65.2 R66.1 | length 185.6
  Top Layer w10: R66.1 3304.24,3320.93 Q8.2 3307.6,3422.48 R65.2
NetQ8_3: Q8.3 R64.2 | length 101.7
  Top Layer w10: Q8.3 3382.4,3422.28 R64.2
NetR3_1: R3.1 U2.1 | length 100.6
  Top Layer w10: U2.1 208.54,2773.54 R3.1
NetR5_1: R5.1 U2.2 | length 233.9
  Top Layer w10: R5.1 110,2650 135,2625 U2.2
NetR8_1: R8.1 U1.1 | length 100.7
  Top Layer w10: U1.1 203.43,3243.43 R8.1
NetR9_1: R9.1 U1.2 | length 224.6
  Top Layer w10: R9.1 120,3110 135,3095 U1.2
NetR15_2: R15.2 S1.3 | length 185.2
  Top Layer w10: S1.3 1301.57,2245 R15.2
NetR16_2: R16.2 S1.2 | length 195.6
  Top Layer w10: S1.2 1326.57,2170 R16.2
NetR17_2: R17.2 S1.1 | length 174.9
  Top Layer w10: S1.1 R17.2
NetR18_2: R18.2 R19.2 R20.2 R21.1 R22.1 R23.2 R24.2 R25.2 R27.2 | length 1647.5
  Top Layer w10: R27.2@611.57,2095 R27.2 631.46,2114.88 855,2114.88 R22.1 R21.1 R20.2@855,1615.12 ; R25.2 904.88,2165 1104.88,2165 R19.2 R18.2
NetR20_1: R20.1 S2.1 | length 170
  Top Layer w10: R20.1 S2.1
NetR21_2: R21.2 S2.2 | length 169.9
  Top Layer w10: R21.2 S2.2
NetR22_2: R22.2 S2.3 | length 169.9
  Top Layer w10: R22.2 S2.3
NetR23_1: R23.1 S2.4 | length 170
  Top Layer w10: R23.1 S2.4
NetR24_1: R24.1 S2.5 | length 170
  Top Layer w10: R24.1 S2.5
NetR25_1: R25.1 S2.6 | length 170
  Top Layer w10: R25.1 S2.6
NetR26_1: R26.1 R27.3 | length 221.9
  Top Layer w10: R27.3@633.15,2215 R26.1
NetR53_2: R53.2 R54.1 | length 197.2
  Top Layer w10: R54.1 2594.88,3670 R53.2
PO-22-042: DJ02.42 DP03.1 R10.1 | length 2665
  Top Layer w30: R10.1 2195,3745 DP03.1
  Bottom Layer w30: DP03.1 2260,3700 2580,3380 3490,3380 3964.49,2905.51 DJ02.42
SCL: C5.2 L3.1 R68.1 | length 424.9
  Top Layer w10: L3.1 C5.2@1094.06,3373.94 ; L3.1@1099.06,3280 R68.1
SDA: C6.2 L2.1 R69.1 | length 427
  Top Layer w10: L2.1 1099.17,3180 R69.1 ; C6.2 L2.1@1095,3184.17
TB-22-011: DJ02.11 DJ73.2 F5.1 | length 2388.4
  Top Layer w30: DJ73.2 1791.57,1370 F5.1 4123.27,1370 DJ02.11
TB-22-029: DJ02.29 DJ76.2 R18.1 | length 2933.7
  Top Layer w10: R18.1 1753.43,2635 DJ76.2@1755,2636.57
  Top Layer w20: v1@2505,2369.88 v1(3485,2369.88)
  Bottom Layer w20: DJ76.2 2083.43,2636.57 2350.12,2369.88 v1@2505,2369.88 ; v1(3485,2369.88) 3532.44,2322.44 4285,2322.44 DJ02.29
  other v1: 2505,2370
TB-22-030: DJ02.30 DJ74.2 F3.1 | length 2852.3
  Top Layer w25: DJ74.2 1833.43,1765 F3.1 ; F3.1@2050,1770 F3.1 ; DJ02.30 2470.31,2480.31 2055,2065 F3.1
TB-22-056: DJ73.1 DJ74.1 | length 402.8
  Top Layer w25: DJ73.1 1675,1585 1675,1705 DJ74.1
TS-22-038N: DJ02.38 DJ76.1 R26.2 S2.7 | length 3792.9
  Top Layer w10: R26.2 S2.7
  Top Layer w20: S2.7 1080,2375 1440,2735 DJ76.1 ; v1(2205,2640) 4279.72,2640 DJ02.38
  Bottom Layer w20: DJ76.1 2110,2735 v1(2205,2640)
TS-22-039: DJ02.39 DJ76.3 R19.1 | length 2677.9
  Top Layer w10: R19.1 1753.15,2540 DJ76.3@1755,2538.15
  Top Layer w20: DJ76.3 1863.15,2538.15 2124.21,2799.21 DJ02.39
VA-16-014: DJ02.14 DJ61.1 R42.1 | length 3137.8
  Top Layer w10: R42.1 1770,1150 DJ61.1
  Top Layer w30: v1(2270,1435) 4237.32,1435 DJ02.14 ; DJ02.14@4281.81,1511.81 DJ02.14 ; DJ02.14@4291.81,1511.81 DJ02.14
  Bottom Layer w30: DJ61.1 1980,1145 v1(2270,1435)
VA-16-015: DJ02.15 DJ61.4 R48.1 | length 3171.1
  Top Layer w10: R48.1 1595.28,670 DJ61.4
  Top Layer w30: v1(2845,1675) 2847.17,1677.17 DJ02.15
  Bottom Layer w30: DJ61.4 1909.72,849.72 2740,1680 v1@2835,1680
VA-16-016: DJ02.16 DJ61.7 R49.1 | length 3466.8
  Top Layer w10: R49.1 1640.55,420 DJ61.7
  Top Layer w30: v1(2925,1595) 2930,1600 4236.97,1600 DJ02.16 DJ02.16@4297.17,1677.17
  Bottom Layer w30: DJ61.7 2815.55,1595 v1(2925,1595)
VA-16-017N: DJ02.17 SP2.2 | length 2302
  Top Layer w30: SP2.2 v1(2675,1020) ; v1(3490,1845) 3492.48,1842.52 DJ02.17
  Bottom Layer w30: v1(2675,1020) v1@3490,1835
VA-16-020: DJ02.20 DJ61.3 R43.1 | length 3379.7
  Top Layer w10: R43.1 1746.85,920 DJ61.3
  Top Layer w30: v1(2885,1925) 4231.26,1925 DJ02.20
  Bottom Layer w30: DJ61.3 1908.15,948.15 v1(2885,1925)
VA-16-049N: DJ61.6 SP1.1 | length 337.8
  Top Layer w30: DJ61.6 1842.13,720 SP1.1
VA-16-050N: DJ61.8 SP1.3 | length 378.6
  Top Layer w30: DJ61.8 1919.45,456.02 SP1.3
VA-16-051N: SP1.2 SP2.4 | length 201.6
  Top Layer w30: SP1.2 SP2.4
VA-16-052N: DJ61.5 SP2.3 | length 380.5
  Top Layer w30: DJ61.5 1945.28,921.57 SP2.3
VA-16-053N: DJ61.2 SP2.1 | length 321
  Top Layer w30: DJ61.2 2058.43,1046.57 SP2.1
VA_LED1: Q1.1 VA1.A VA.1 | length 418.2
  Top Layer w10: VA.1 955,1110 VA1.A Q1.1
VA_LED2: Q2.1 VA2.A VA.2 | length 364.3
  Top Layer w10: VA.2 825,880 VA2.A Q2.1
VA_LED3: Q3.1 VA3.A VA.3 | length 387.1
  Top Layer w10: VA.3 880,635 VA3.A Q3.1
VA_LED4: Q4.1 VA4.A VA.4 | length 466.8
  Top Layer w10: VA.4 780,605 VA4.A Q4.1
VCC: R11.2 R38.1 R39.1 R44.1 R45.1 R50.1 R55.1 R60.1 R64.1 R72.1 | length 7246.8
  Top Layer w10: R50.1 v1@1475,105 ; R45.1 v1(1480,350) ; R44.1 v1(1480,595) ; R39.1 v1(1480,840) ; R38.1 v1(1480,1070) ; R72.1@2359.88,3414.88 R72.1
  Top Layer w30: v1(1800,2855) 3440,2855 3545,2960 3545,3385 v2(3450,3480) R64.1 ; R72.1 2299.88,3475.12 R11.2 2280,3490 2325,3535 2580,3535 v2(2635,3480) ; R55.1 v2(2970,3480) ; R60.1 v2(3225,3480)
  Bottom Layer w30: v1(1480,105) v1(1480,350) v1(1480,595) v1(1480,840) v1(1480,1070) 1480,2535 v1(1800,2855) ; v2(2635,3480) v2(2970,3480) v2(3225,3480) v2(3450,3480)
WP: R4.1 R71.1 U2.7 | length 1334.7
  Top Layer w10: U2.7 505,2625 ; R4.1 505,2625 ; R71.1 1070,2625 505,2625
pads on no net: DJ02.12 DJ02.13 DJ02.18 DJ02.33 DJ02.34 DJ61.9 DJ76.4 R27.1 R54.3 U3.4

## Keep-outs
Keep-Out Layer:
  the board outline again, w10

## Text inside footprints (layer, text, board x,y; h text height)
HE: Top Overlay "1" at 2531.93,832.87 h35 r270
MO: Top Overlay "1" at 2992.13,3009.06 h35
S1: Top Overlay "1" at 1213.58,2008.19 h35 r90
S2: Top Overlay "1" at 1017.01,1607.13 h35 r90
VA: Top Overlay "1" at 846.93,942.87 h35 r270